# Altium PCB PCB.pcbdoc (part 1 of 2)
Units mil, origin at the board's own origin, x right, y up, seen from the top; angles counter-clockwise.
Board outline 3007 x 2843 mil, 2 copper layers (Top Layer, Bottom Layer); 56 components, 63 nets, 248 pads, 115 vias.
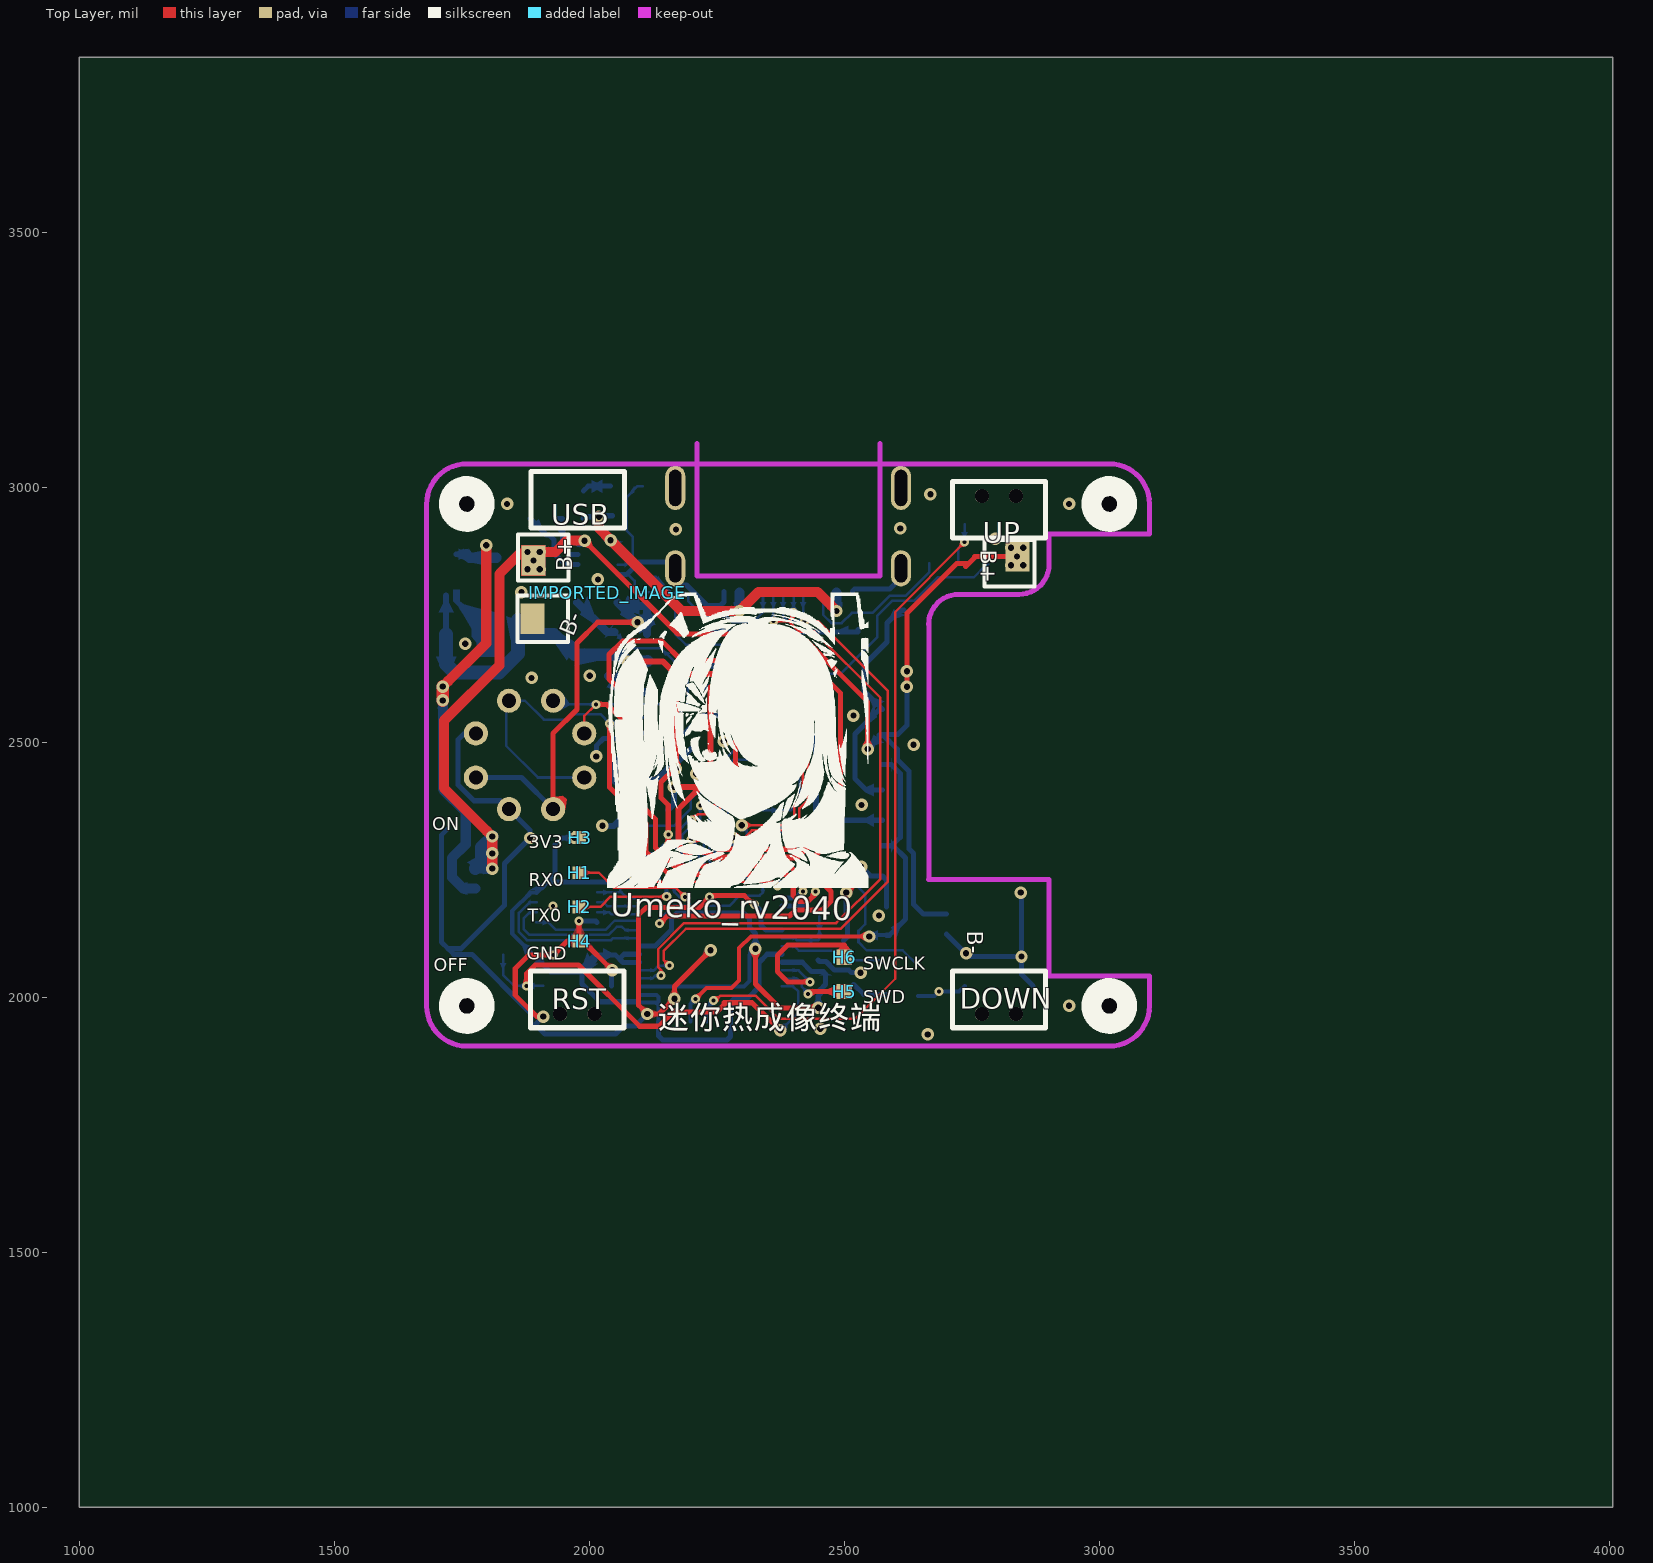
[diagram p0: Top Layer view]
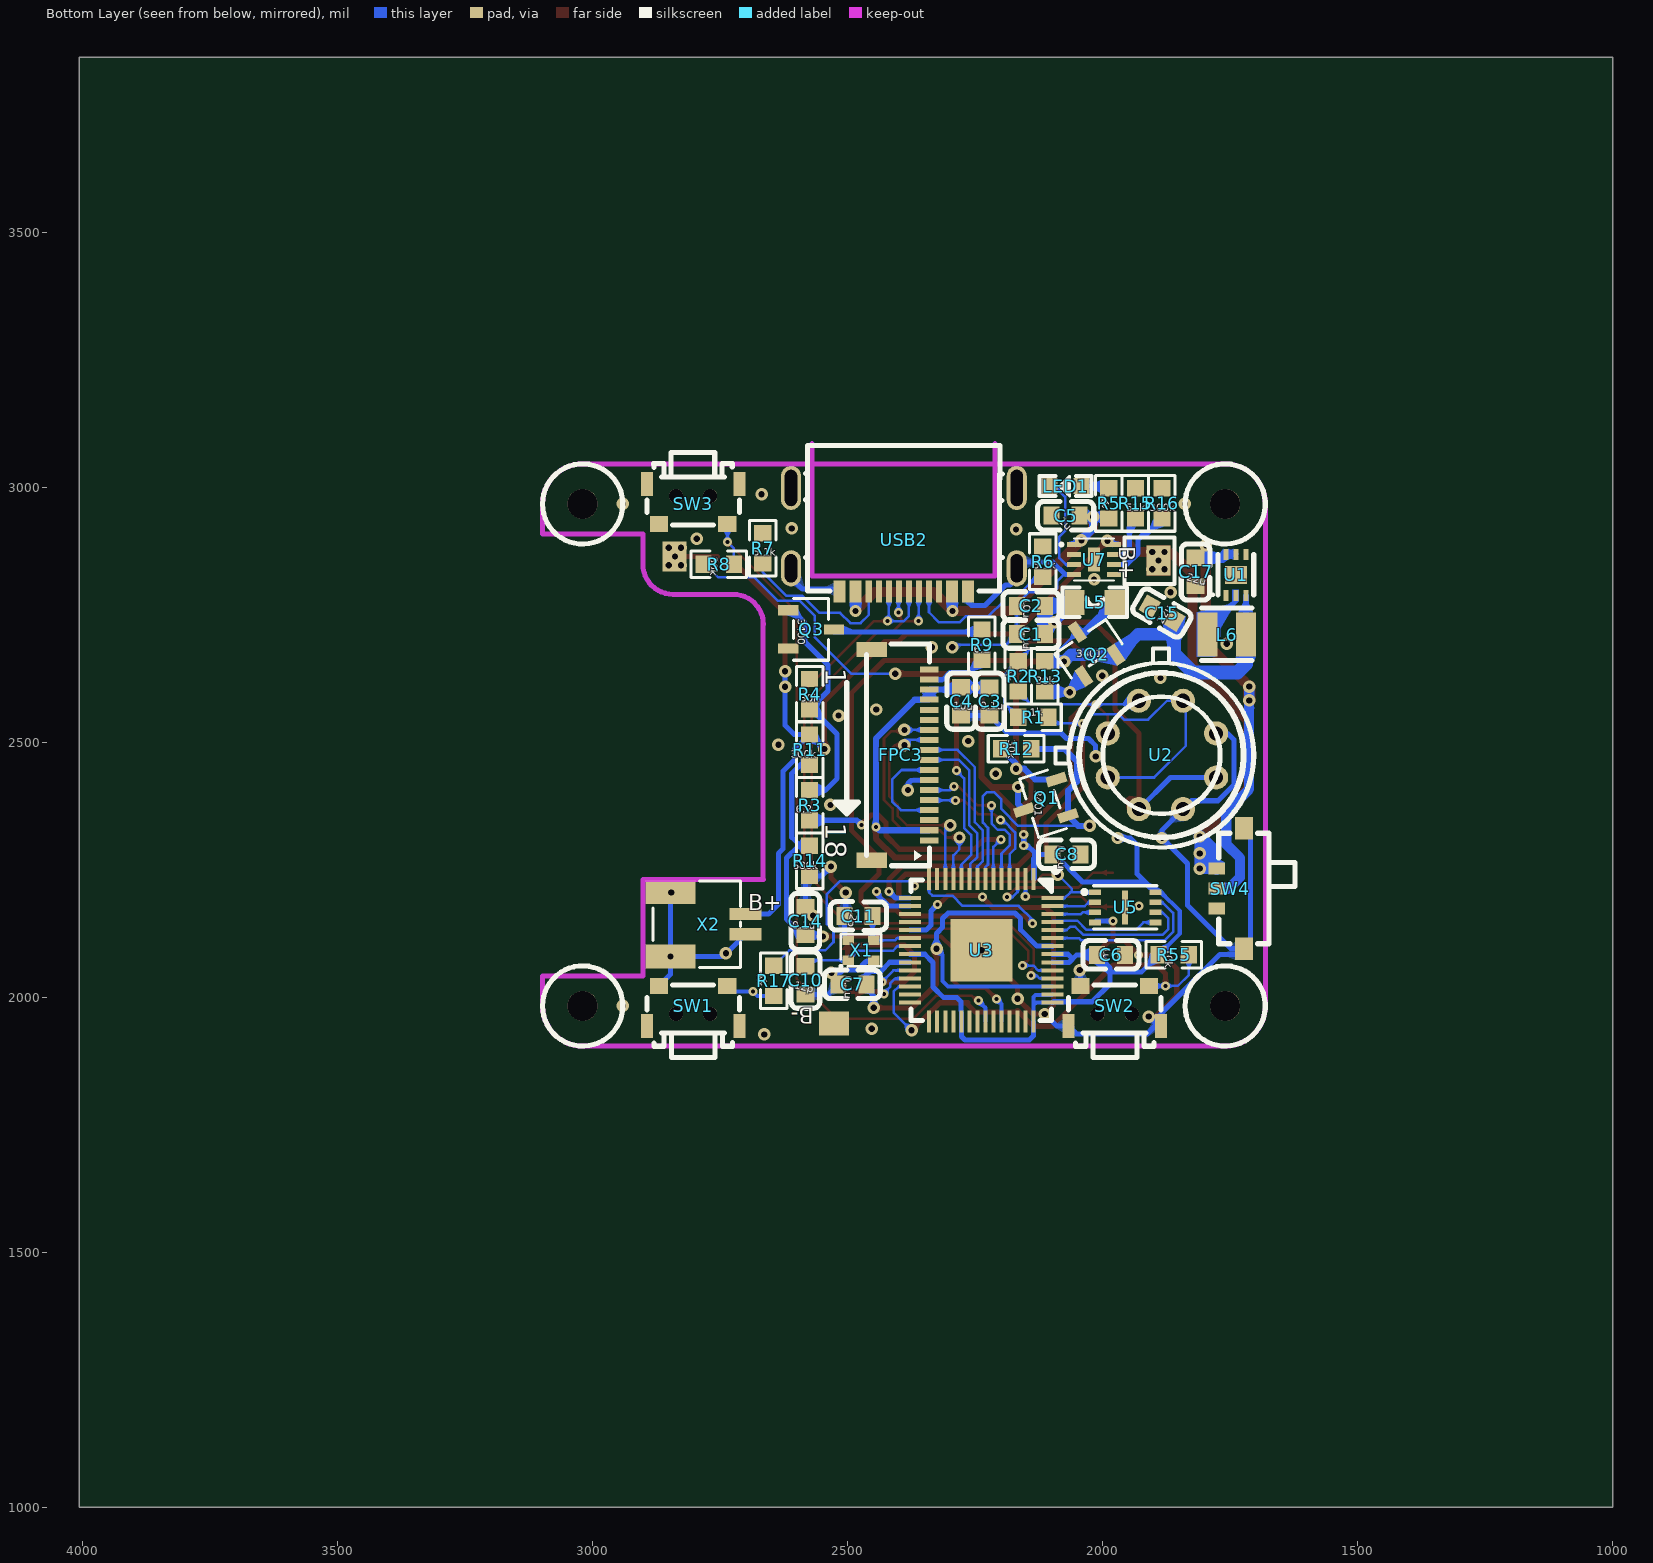
[diagram p1: Bottom Layer view, seen from below]

## Layer stack, top to bottom
Top Layer: signal copper (thickness not stored)
Dielectric: dielectric 12.6, FR-4, Dk 4.8
Bottom Layer: signal copper (thickness not stored)

## Board outline
4007,1000 1000,1000 1000,3843 4007,3843

## Components (designator, comment, footprint, x,y, rotation, side; value= is the part's Value field where it differs from the comment)
C1 "100nF" C0603 2141,2712 r180 bottom
C2 "10uF" C0603 2141,2767 r180 bottom
C3 "100nF" C0603 2222,2580 r90 bottom
C4 "10uF" C0603 2277.94,2580.06 r90 bottom
C5 "1uF" C0603 2073,2944 r180 bottom
C6 "1U" C0603 1984.04,2082.96 r0 bottom
C7 "1U" C0603 2491.04,2024.96 r180 bottom
C8 "0.1U" C0603 2071,2280 r0 bottom
C10 "12pf" C0603 2583,2033 r90 bottom
C11 "12pf" C0603 2479,2159 r0 bottom
C14 "100nF" C0603 2583,2149 r270 bottom
C15 "22uF" C0603 1883.94,2753.06 r30 bottom
C17 "22uF" C0603 1818.04,2833.96 r270 bottom
FPC3 "0.5K-HX-18PWB" FPC-SMD_18P-P0.50_HDGC_0.5K-HX-18PWB 2389.92,2474.88 r90 bottom
H1 "hp" HANPAN#1 1980,2244 r0 top
H2 "hp" HANPAN#1 1980,2177 r0 top
H3 "hp" HANPAN#1 1981,2313 r90 top
H4 "hp" HANPAN#1 1980,2110 r90 top
H5 "hp" HANPAN#2 2500,2011 r90 top
H6 "hp" HANPAN#2 2500,2078 r90 top
IMPORTED_IMAGE "IMPORTED_IMAGE" IMPORTED_IMAGE 2035.46,2792.56 r0 top
L5 "10uH" 0805-L 2015.94,2774.06 r0 bottom
L6 "SWPA252012S4R7MT" IND-SMD_L2.5-W2.0_SWPA252012S 1757,2711 r0 bottom
LED1 "led-0603" LED-0603 2073,3002 r0 bottom
Q1 "AO3401" SOT-23-3_L2.9-W1.3-P1.90-LS2.4-BR 2117,2379 r342 bottom
Q2 "AO3401" SOT-23-3_L2.9-W1.3-P1.90-LS2.4-BR 2027.94,2683.06 r56 bottom
Q3 "AO3400" SOT-23-3_L2.9-W1.4-P1.91-LS2.6-BR 2572,2721 r180 bottom
R1 "1K" R0603 2135.94,2549.06 r180 bottom
R2 "1K" R0603 2165.94,2629.06 r270 bottom
R3 "6.2" R0603 2574.94,2376.5 r270 bottom
R4 "30k" R0603 2574.94,2594.06 r270 bottom
R5 "1K" R0603 1988,2968 r270 bottom
R6 "5.1K" R0603 2117.94,2854.06 r270 bottom
R7 "5.1K" R0603 2667,2880 r90 bottom
R8 "30k" R0603 2753,2849 r180 bottom
R9 "6.2" R0603 2236.94,2691.06 r90 bottom
R11 "300K" R0603 2574.94,2485.46 r270 bottom
R12 "30k" R0603 2170,2487 r180 bottom
R13 "30k" R0603 2113.94,2629.06 r270 bottom
R14 "680K" R0603 2574.94,2267.06 r270 bottom
R15 "51K" R0603 1936,2968 r90 bottom
R16 "300K" R0603 1884,2968 r90 bottom
R17 "1k" R0603 2645,2032 r90 bottom
R55 "10K" R0603 1861,2083 r0 bottom
SW1 "1TS003B" KEY-SMD_1TS003B 2803.3,1982.75 r0 bottom
SW2 "1TS003B" KEY-SMD_1TS003B 1976.53,1982.75 r0 bottom
SW3 "1TS003B" KEY-SMD_1TS003B 2803.3,2967 r180 bottom
SW4 "SSAJ120100" SW-SMD_SSAJ120100 1750,2213 r270 bottom
U1 "SGM6036-3.3" UTDFN-6_L2.0-W1.5-P0.50-BL-EP 1739,2828 r0 bottom
U2 "MLX90640ESF-BAB-000-TU" TO-39-4_MELEXIS_MLX90640 1885.98,2474.88 r0 bottom
U3 "RP2040" LQFN-56_L7.0-W7.0-P0.4-EP 2238,2092 r90 bottom
U5 "W25Q16JVUXIQ" USON-8_L3.0-W2.0-P0.50-BL-EP 1956,2176 r90 bottom
U7 "SGM4056-6.8YTDE8G" TDFN-8L_L2.0-W2.0-P0.50-BL-EP 2017,2858 r90 bottom
USB2 "TYPEC-302-BRP16SC16" USB-C-SMD_TYPEC-302-BRP16SC16 2390,2897 r180 bottom
X1 "12MHz" 2016_4P 2474,2092 r0 bottom
X2 "AFC10-S02QCA-00" CONN-SMD_AFC10-S02QCA-00 2774,2143 r90 bottom

## Footprints (in the part's own frame and the unit in brackets; to place one, negate y for a bottom-side part, rotate by r counter-clockwise, add the part's x,y. Pads: shape width x height; smd on the part's side, far side on the other; paste and mask are expansions set on the pad)
0805-L [mm]
  rect 1x1.25 smd paste+0 mask+0.051: 1(1,0) 2(-1,0)
  silkscreen extent -1.6,-0.73 1.6,0.73
2016_4P [mm]
  rect 0.575x0.475 smd paste+0 mask+0.051: 1(0.638,0.488) 2(-0.638,0.488) 3(-0.638,-0.488) 4(0.638,-0.488)
  silkscreen extent -1,-0.8 1.05,0.85
C0603 [mm]
  rect 0.8x0.9 smd paste+0 mask+0.051: 1(0.7,0) 2(-0.7,0)
  silkscreen extent -1.39,-0.72 1.41,0.71
CONN-SMD_AFC10-S02QCA-00 [mm]
  rect 0.6x1.6 smd paste+0 mask+0.05: 1(0.5,-1.87) 2(-0.5,-1.87)
  rect 1.2x2.5 smd paste+0 mask+0.05: 3(1.61,1.87) 4(-1.61,1.87)
  silkscreen extent -2.15,-1.63 2.15,2.74
FPC-SMD_18P-P0.50_HDGC_0.5K-HX-18PWB [mm]
  rect 0.3x0.9 smd paste+0 mask+0.05: 1(-4.25,-1.261) 2(-3.75,-1.261) 3(-3.25,-1.261) 4(-2.75,-1.261) 5(-2.25,-1.261) 6(-1.75,-1.261) 7(-1.25,-1.261) 8(-0.75,-1.261) 9(-0.25,-1.261) 10(0.25,-1.261) 11(0.75,-1.261) 12(1.25,-1.261) 13(1.75,-1.261) 14(2.25,-1.261) 15(2.75,-1.261) 16(3.25,-1.261) 17(3.75,-1.261) 18(4.25,-1.261)
  rect 0.762x1.5 smd paste+0 mask+0.05: 19(5.25,1.6) 20(-5.25,1.6)
  silkscreen extent -5.52,-1.27 5.52,1.87
HANPAN#1 [mil]
  rect 25x25 smd paste+0 mask+2: 1(0,0)
HANPAN#2 [mil]
  rect 30x30 smd paste+0 mask+2: 1(0,0)
IMPORTED_IMAGE [mil]
  silkscreen extent 0,-578 512,0
IND-SMD_L2.5-W2.0_SWPA252012S [mm]
  rect 1x2.2 smd paste+0 mask+0.051: 1(0.95,0) 2(-0.951,0)
  silkscreen extent -1.26,-1.32 1.24,1.3
KEY-SMD_1TS003B [mm]
  rect 0.9x0.8 smd paste+0 mask+0.051: 1(-1.7,-1) 2(1.7,-1)
  rect 0.6x1.2 smd paste+0 mask+0.051: 3(2.3,1) 4(-2.3,1)
  round 0.7 hole 0.7 unplated paste+0: ""(-0.85,0.4) ""(0.85,0.4)
  silkscreen extent -2.3,-1.04 2.3,2.57
LED-0603 [mm]
  rect 0.8x0.8 smd paste+0 mask+0.102: 1(0.8,0) 2(-0.8,0)
  silkscreen extent -1.3,-0.5 1.3,0.5
LQFN-56_L7.0-W7.0-P0.4-EP [mm]
  rect 1.1x0.2 smd paste-100 mask+0.05: 1(3.55,-2.6) 2(3.55,-2.2) 3(3.55,-1.8) 4(3.55,-1.4) 5(3.55,-1) 6(3.55,-0.6) 7(3.55,-0.2) 8(3.55,0.2) 9(3.55,0.6) 10(3.55,1) 11(3.55,1.4) 12(3.55,1.8) 13(3.55,2.2) 14(3.55,2.6) 29(-3.55,2.6) 30(-3.55,2.2) 31(-3.55,1.8) 32(-3.55,1.4) 33(-3.55,1) 34(-3.55,0.6) 35(-3.55,0.2) 36(-3.55,-0.2) 37(-3.55,-0.6) 38(-3.55,-1) 39(-3.55,-1.4) 40(-3.55,-1.8) 41(-3.55,-2.2) 42(-3.55,-2.6)
  rect 0.2x1.1 smd paste-100 mask+0.05: 15(2.6,3.55) 16(2.2,3.55) 17(1.8,3.55) 18(1.4,3.55) 19(1,3.55) 20(0.6,3.55) 21(0.2,3.55) 22(-0.2,3.55) 23(-0.6,3.55) 24(-1,3.55) 25(-1.4,3.55) 26(-1.8,3.55) 27(-2.2,3.55) 28(-2.6,3.55) 43(-2.6,-3.55) 44(-2.2,-3.55) 45(-1.8,-3.55) 46(-1.4,-3.55) 47(-1,-3.55) 48(-0.6,-3.55) 49(-0.2,-3.55) 50(0.2,-3.55) 51(0.6,-3.55) 52(1,-3.55) 53(1.4,-3.55) 54(1.8,-3.55) 55(2.2,-3.55) 56(2.6,-3.55)
  rect 3.1x3.1 smd paste-100 mask+0.05: 57(0,0)
  silkscreen extent -3.5,-3.83 4.13,3.5
R0603 [mil]
  rect 31.75x34.02 smd paste-3937.01 mask+2: 1(29.66,0) 2(-29.65,0)
  silkscreen extent -55,-26 55,26
SOT-23-3_L2.9-W1.3-P1.90-LS2.4-BR [mm]
  rect 1x0.5 smd paste+0 mask+0.051: 1(-1,0.95) 2(-1,-0.95) 3(1,0)
  silkscreen extent -0.73,-1.53 0.73,1.53
SOT-23-3_L2.9-W1.4-P1.91-LS2.6-BR [mm]
  rect 1x0.5 smd paste+0 mask+0.051: 1(-1.135,0.955) 2(-1.135,-0.955) 3(1.135,0)
  silkscreen extent -0.88,-1.54 0.88,1.54
SW-SMD_SSAJ120100 [mm]
  rect 0.6x0.8 smd paste+0 mask+0.051: 1(1,-0.675) 2(-1,-0.675) C(0,-0.675)
  rect 1.1x0.9 smd paste+0 mask+0.051: 4(3,0.675) 5(-3,0.675)
  silkscreen extent -2.75,-0.58 2.75,3.22
TDFN-8L_L2.0-W2.0-P0.50-BL-EP [mm]
  rect 0.25x0.7 smd paste+0 mask+0.051: 1(0.75,1) 2(0.25,1) 3(-0.25,1) 4(-0.75,1) 5(-0.75,-1) 6(-0.25,-1) 7(0.25,-1) 8(0.75,-1)
  rect 1.2x0.6 smd paste+0 mask+0.051: 9(0,0)
  silkscreen extent -1.05,-1 1.05,1.63
TO-39-4_MELEXIS_MLX90640 [mm]
  round 1.2 hole 0.7 paste+0 mask+0.05: 1(1.1,-2.699) 2(1.1,2.701) 3(-1.1,2.701) 4(-1.1,-2.699)
  silkscreen extent -4.6,-5.3 4.6,4.6
USB-C-SMD_TYPEC-302-BRP16SC16 [mm]
  rect 0.6x1.1 smd paste-100 mask+0.05: 1(3.2,-2.575) 2(2.4,-2.575) 11(-2.4,-2.575) 12(-3.2,-2.575)
  rect 0.3x1.1 smd paste-100 mask+0.05: 3(1.75,-2.575) 4(1.25,-2.575) 5(0.75,-2.575) 6(0.25,-2.575) 7(-0.25,-2.575) 8(-0.75,-2.575) 9(-1.25,-2.575) 10(-1.75,-2.575)
  oval 1x1.8 hole 0.61 slot 1.4 at 90 deg paste+0 mask+0.05: 13(5.62,-1.425) 14(-5.62,-1.425)
  oval 1x2.2 hole 0.61 slot 1.8 at 90 deg paste+0 mask+0.05: 15(5.62,2.575) 16(-5.62,2.575)
  Keep-Out Layer lines w0.254: 4.533,-1.819 4.533,4.781 ; 4.518,-1.813 -4.582,-1.813 ; -4.582,-1.818 -4.582,4.782
  silkscreen extent -4.9,-2.56 4.9,4.7
USON-8_L3.0-W2.0-P0.50-BL-EP [mm]
  rect 0.28x0.6 smd paste+0 mask+0.051: 1(0.75,1.507) 2(0.25,1.507) 3(-0.25,1.507) 4(-0.75,1.507) 5(-0.75,-1.508) 6(-0.25,-1.507) 7(0.25,-1.508) 8(0.75,-1.507)
  rect 1.7x0.3 smd paste+0 mask+0.051: 9(0,0)
  silkscreen extent -1.08,-1.58 1.08,2.13
UTDFN-6_L2.0-W1.5-P0.50-BL-EP [mm]
  rect 0.25x0.55 smd paste+0 mask+0.05: 1(0.5,1.025) 2(0,1.025) 3(-0.5,1.025) 4(-0.5,-1.025) 5(0,-1.025) 6(0.5,-1.025)
  rect 1.1x0.9 smd paste+0 mask+0.05: 7(0,0)
  silkscreen extent -0.89,-1 1.22,1.05

## Free pads (board coordinates)
  rect 47.24x59.05 smd paste+0 mask+2: 1(1889.01,2741.99) 1(1891,2856) 1(2840,2864)
  rect 47.24x59.05 smd far side paste+0 mask+2: 1(1891,2856) 1(2840.04,2863.96)
  round 47.24 hole 27.56 paste+0 mask+1.97: 1(1990.27,2430.67) 2(1777.66,2430.67) 3(1777.66,2517.29) 4(1990.27,2517.29)
  rect 59.05x47.24 smd far side paste+0 mask+2: 1(2527,1948)
  round 59.06 hole 59.06 unplated paste+0: ""(1760,1982.75) ""(1760,2967) ""(3019.84,1982.75) ""(3019.84,2967)

## Via types
v1: diameter 24.41, hole 12.2, Top Layer to Bottom Layer, tented both sides, 77 vias
v2: diameter 17.72, hole 7.87, Top Layer to Bottom Layer, tented both sides, 36 vias
v3: diameter 23.62, hole 11.81, Top Layer to Bottom Layer, tented both sides, 2 vias

## Nets (pads, with @x,y where several pads share a name; then routed paths per layer and width w, separated by ;. In a path a pad name is that pad's centre, name@x,y a point inside that pad or via, vN(x,y) a via of type N, cw(c..) or ccw(c..) an arc to the next point about the centre after c; other vN are vias at no path point)
1.1V: C7.1 U3.23 U3.45 U3.50 | length 991.5
  Top Layer w10: v1(2326,2095) 2326,2026 2372.99,1979 v1(2449,1979)
  Bottom Layer w8: U3.45@2098.24,2021.16 2303.14,2021.16 2314.04,2031.96 2314.04,2082.96 v1(2326,2095)
  Bottom Layer w10: U3.50@2098.23,2099.88 2129.04,2099.96 2161.04,2131.96 2161.04,2153.96 2172.04,2164.96 2303.04,2164.96 2314.04,2153.96 2314.04,2136.96 2326.04,2124.96 v1(2326,2095) ; U3.23@2377.74,2068.36 2417.64,2068.36 2436.04,2049.96 2459.04,2049.96 2463.44,2045.56 2463.44,2024.96 2453.04,2014.56 2453.04,2005.96 2449.04,2001.96 v1(2449,1979)
3V3: C6.1 C8.1 C15.2 H3.1 L6.2 Q1.2 Q2.2 R8.2 R12.2 R13.2 R55.1 U1.3 U3.1 U3.10 U3.22 U3.33 U3.42 U3.43 U3.44 U3.48 U3.49 U5.8 | length 4302.2
  Top Layer w10: v2(2155,2319) v2(2155,2297) 2155,2377 2141,2391 2141,2422 2167,2448 v1(2170,2448) ; v2(2287,2444) 2287.04,2602.96 2318.04,2633.96 v1(2407,2634)
  Top Layer w11.81: v1(2076,2658) 2145,2658 2170,2632.99 v1(2170,2448) ; 2169.94,2633.06 2170.89,2634 v1(2407,2634)
  Bottom Layer w5: U3.10@2277.34,2231.76 2277.34,2259.66 2258.04,2278.96 2258.04,2318.06 2272.04,2331.96 2272.04,2428.96 v2(2287,2444) ; v1(2407,2634) 2493.04,2633.96 2564.94,2705.96 2564.94,2747.96 2594.04,2776.96 2636.96,2776.96 2683,2823 2754,2823 2780,2849 R8.2@2782.66,2849
  Bottom Layer w8: R55.1@1890.64,2082.96 1849.04,2124.66 1849.04,2168.96 1885.54,2205.56 U5.8@1896.64,2205.56 ; U3.43@2098.24,1989.66 2131.04,1988.96 2135.64,1984.36 ; U3.44@2098.23,2005.39 2099.64,2003.96 2132.04,2003.96 2135.64,2000.36 2135.64,1984.36 ; U3.42@2135.64,1952.26 2135.64,1984.36
  Bottom Layer w10: R55.1@1890.64,2082.96 1924.64,2048.96 1988.04,2048.96 2011.54,2072.56 C6.1@2011.54,2082.96 ; v1(1971,2312) 1946.04,2311.96 1933.04,2298.96 1933.04,2241.86 1896.64,2205.56 1917.14,2225.96 2039.94,2225.96 2094.04,2279.96 2127.04,2279.96 2135.64,2271.36 U3.1@2135.64,2231.77 2134.04,2233.36 2134.04,2283.96 2147.04,2296.96 v2(2155,2297) ; 2059.04,2074.96 2068.24,2084.16 U3.49@2098.24,2084.16 ; U3.43@2098.24,1989.66 2096.84,1990.96 2021.04,1990.96 1986.04,2025.96 1986.04,2057.46 C6.1@2011.54,2082.96 ; U3.48@2098.23,2068.38 2066.04,2067.96 2051.04,2082.96 C6.1@2011.54,2082.96 ; U3.42@2135.64,1952.26 2135.64,1924.36 2144.04,1915.96 2270.04,1915.96 2277.04,1922.96 2277.34,1952.26 2278.04,1990.96 2286.04,1998.96 2311.94,1998.96 2333.04,2019.96 2333.04,2067.96 2349.14,2084.16 2377.74,2084.16 U3.22@2368.14,2084.16 ; v2(2155,2297) v2(2155,2319)
  Bottom Layer w11.81: U1.3@1719.34,2787.66 1719.34,2711.26 L6.2@1719.54,2710.96 ; Q1.2@2091.14,2426.76 2132.74,2426.76 2153.94,2447.96 v1(2170,2448) 2170.04,2457.39 R12.2@2199.65,2487
  Bottom Layer w23.62: C15.2@1860.04,2739.26 1860.04,2711.56 1930.94,2711.56 1971.14,2671.36 1974.94,2671.36 2062.64,2671.36 v1(2076,2658) R13.2@2113.94,2658.76
  Bottom Layer w27.56: L6.2@1719.54,2710.96 1719.54,2653.46 1736.04,2636.96 1822.84,2636.96 1860.04,2674.16 C15.2@1860.04,2739.26
+5V: C5.1 R5.1 U7.1 USB2.2 USB2.11 | length 809.4
  Top Layer w19.68: v1(2019,2942) 2019,2919 v1(2042,2896) 2180.5,2757.5 v3(2294.94,2757.5) 2332.25,2794.81 2447.63,2794.81 v3(2484.94,2757.5)
  Bottom Layer w10: R5.1@1988.04,2938.36 1991.64,2941.96 v1(2019,2942) 2021.04,2943.96 C5.1@2045.44,2944 ; U7.1@2050.44,2887.56 v1(2042,2896) U7.1@2050.44,2887.56 ; U7.1@2050.44,2887.56 2056.34,2887.56 U7.1@2050.44,2887.56
  Bottom Layer w15.75: v1(2019,2942) 2019,2919 v1(2042,2896)
  Bottom Layer w19.68: v3(2294.94,2757.5) 2295.04,2757.56 USB2.2@2295.04,2793.36 ; USB2.11@2484.84,2793.36 2484.84,2757.66 v3(2484.94,2757.5)
ADC: C14.1 R11.1 R14.2 U3.38 | length 945.6
  Top Layer w8: v2(2208,1996) 2230.04,2017.96 2279.04,2017.96 2294.04,2032.96 2294.04,2095.96 2317.04,2118.96 v1(2549.04,2118.96)
  Bottom Layer w8: U3.38@2198.64,1952.26 2198.64,1986.66 v2(2208,1996) ; v1(2549.04,2118.96) 2551.54,2121.46 C14.1@2583.04,2121.46
  Bottom Layer w10: R11.1@2574.94,2455.86 2592.64,2455.86 2609.94,2438.46 2609.94,2313.46 2593.14,2296.76 2574.94,2296.76 2596.24,2296.76 2620.04,2272.96 2620.04,2152.96 2588.44,2121.46 C14.1@2583.04,2121.46
BAT: pad.1@1891,2856 pad.1@2840,2864 pad.1@2840.04,2863.96 R11.2 SW4.2 U7.8 X2.1 | length 2921.9
  Top Layer w10: v1(1991,2895) 2174.05,2711.96 2386.04,2711.96 2401.04,2696.96 2428.04,2696.96 2545.94,2579.06 v1(2545.94,2486.5) ; v1(2623,2608.54) v1(2623,2639) ; v1(2623,2639) 2623.04,2752.96 2720.04,2849.96 2744.04,2849.96 ; 2738.25,2844.25 2756,2862 2756,2864 v1(2839,2864)
  Top Layer w19.68: v1(1879,2873) 1934,2873 1956,2895 v1(1991,2895)
  Top Layer w20: v1(1810,2252) v1(1810,2281.91) v1(1810,2315) ; v1(1810,2315) 1715.04,2409.96 1715.04,2541.96 1824.04,2650.96 1824.04,2829.96 1863.04,2868.96 1875.04,2868.96 v1(1879,2873)
  Bottom Layer w10: U7.8@1977.64,2887.56 1983.54,2887.56 v1(1991,2895) ; v1(2545.94,2486.5) 2567.94,2508.46 2567.94,2514.16 R11.2@2574.94,2514.16 ; R11.2@2574.94,2515.12 2605.12,2515.12 2623,2533 v1(2623,2608.54) v1(2623,2639) ; R11.2@2574.94,2515.16 2604.04,2486.06 2604.04,2465.76 2627.04,2442.86 2627.04,2290.96 2636.04,2281.96 2636.04,2181.96 2655.34,2162.66 X2.1@2700.34,2162.66
  Bottom Layer w20: v1(1810,2252) v1(1810,2281.91) v1(1810,2315) ; v1(1810,2252) 1776.54,2252.36 1806.14,2281.96 v1@1810.04,2281.96
  Bottom Layer w25: SW4.2@1776.54,2252.36 1789.04,2264.76 1789.04,2293.96 v1(1810,2315)
  other v1: 1879,2839 1903,2839 2827,2847 2851,2847 1891,2856 1903,2873 2827,2881 2851,2881
BLK: R3.1 U3.6 | length 519.8
  Top Layer w10: v2(2200,2309) 2233.04,2308.96 2252.14,2289.96 2398.04,2289.96 2425.04,2316.96 2425.04,2341.96 2440.04,2356.96 2454.04,2356.96 v2(2473.04,2337.96)
  Bottom Layer w5: v2(2200,2309) 2214.34,2294.66 U3.6@2214.34,2231.76
  Bottom Layer w10: v2(2473.04,2337.96) 2481.94,2346.86 R3.1@2574.94,2346.86
C1_1: C1.1 C2.1 L5.1 pad.2 U2.2 | length 860.9
  Top Layer w10: U2.2@1929.24,2368.56 1929.24,2517.26 1975.94,2563.96 1975.94,2694.46 2016.54,2735.06 v1(2094.94,2735.06)
  Bottom Layer w10: pad.2@1777.66,2430.67 1867.18,2430.69 U2.2@1929.29,2368.58
  Bottom Layer w13.78: v1(2094.94,2735.06) 2113.44,2716.56 C1.1@2113.44,2712
  Bottom Layer w15.75: v1(2094.94,2735.06) 2094.34,2735.06 L5.1@2055.31,2774.06 2062.44,2766.96 C2.1@2113.44,2767 C1.1@2113.44,2712
C3_1: C3.1 C4.1 FPC3.2 FPC3.15 FPC3.16 Q1.3 | length 1351
  Top Layer w11.81: v1(2166,2412) 2218.08,2412 2238.04,2431.96 2238.04,2606.96 v2(2250,2607) ; 2237,2431 2175.04,2368.86 2175.04,2298.96 2189.04,2284.96 2231.84,2284.96 2242.84,2273.96 2408.04,2273.96 2445.04,2310.96 v2(2445,2334)
  Bottom Layer w11.81: Q1.3@2154.44,2366.83 2166,2378.39 v1(2166,2412) ; C3.1@2222,2607.56 2222.54,2606.96 v2(2250,2607) 2250.64,2607.66 2277.94,2607.66 2282.74,2602.86 2340.24,2602.86 2340.24,2583.16 2368.84,2583.16 2445.04,2506.96 v2(2445,2334) 2438.24,2327.26 FPC3.2@2340.24,2327.26
CAM_VDD: Q2.1 R13.1 U3.14 | length 1742.4
  Top Layer w10: v1(2065,2598) 2039.04,2623.96 2039.04,2671.96 2065.04,2697.96 2143.04,2697.96 2181.04,2659.96 2429.04,2659.96 2493.04,2595.96 2493.04,2327.05 2439,2273.01 2439,2242 2474,2207 2474,2188 2457,2171 2404.98,2171 2392.94,2158.96 2152.97,2158.96 v2(2138,2144)
  Bottom Layer w5: v2(2138,2144) 2138.04,2151.96 2165.04,2178.96 2275.04,2178.96 2295.04,2198.96 2334.04,2198.96 2340.34,2205.36 U3.14@2340.34,2231.76
  Bottom Layer w15.75: Q2.1@2036.94,2629.56 2065.04,2601.46 v1(2065,2598) 2112.54,2597.96 R13.1@2113.94,2599.41
CHA: LED1.1 U7.3 | length 197.8
  Bottom Layer w5: U7.3@2056.34,2848.16 2072.14,2848.16 2084.94,2860.96 2084.94,2903.06 2073.94,2914.06 2073.94,2981.06 2094.84,3001.96 LED1.1@2104.49,3002
CS: FPC3.11 U3.12 | length 441.8
  Top Layer w5: v1(2299,2337) 2384,2337 2402,2355 2402,2377 2418.93,2393.93 2418.93,2482.07 2407,2494 v1(2389,2494)
  Bottom Layer w5: v1(2299,2337) 2308.84,2327.16 U3.12@2308.84,2231.76 ; FPC3.11@2340.24,2504.46 2378.54,2504.46 v1(2389,2494)
DC: FPC3.12 U3.11 | length 494.2
  Top Layer w5: v1(2281,2313) 2305,2313 2319,2327 2392,2327 2412,2347 2412,2370 2429,2387 2429,2507 2415,2521 2392,2521 v1(2389,2524)
  Bottom Layer w5: v1(2281,2313) 2281.04,2289.96 2293.14,2277.86 U3.11@2293.12,2231.77 ; FPC3.12@2340.24,2524.06 v1(2389,2524)
DCDC_VIN: C17.2 SW4.C U1.5 U1.6 | length 879.8
  Top Layer w20: v1(1713,2609) 1798,2694 v1(1798,2886)
  Top Layer w25: v1(1713,2581.76) v1(1713,2609)
  Bottom Layer w10: U1.5@1739,2868.35 U1.6@1758.69,2868.35
  Bottom Layer w20: v1(1713,2581.76) v1(1713,2609) ; v1(1713,2581.76) 1713.04,2407.96 1758.04,2362.96 1758.04,2299.96 1731.04,2273.06 1731.04,2234.96 1753.04,2212.96 SW4.C@1776.54,2212.96 ; U1.6@1758.69,2868.35 1765.54,2861.56 C17.2@1818.04,2861.56
FPC3_17: FPC3.17 R9.2 | length 119.3
  Bottom Layer w10: R9.2@2236.94,2661.41 2261.84,2636.46 2299.94,2636.46 2313.94,2622.56 FPC3.17@2340.24,2622.56
GND: C1.2 C2.2 C3.2 C4.2 C5.2 C6.2 C7.2 C8.2 C10.2 C11.1 C14.2 C15.1 C17.1 FPC3.1 FPC3.7 FPC3.13 FPC3.14 FPC3.18 FPC3.19 FPC3.20 H4.1 pad.1@1889.01,2741.99 pad.1@2527,1948 pad.3 Q3.2 R4.2 R6.2 R7.1 R14.1 R15.1 R16.1 SW1.2 SW1.3 SW1.4 SW2.2 SW2.3 SW2.4 SW3.1 SW3.3 SW3.4 SW4.4 SW4.5 U1.4 U1.7 U2.3 U3.19 U3.57 U5.4 U7.4 U7.5 U7.9 USB2.1 USB2.12 USB2.13 USB2.14 USB2.15 USB2.16 X1.2 X1.4 X2.2 X2.3 X2.4 | length 4488.4
  Top Layer w10: v1(1910,1962) 1897.04,1961.96 1855.04,2003.96 1855.04,2055.96 1882.04,2082.96 v2(1930,2083) 1957.04,2109.96 H4.1@1980,2110 ; v2(1980,2149) H4.1@1980,2110 ; v1(2045,2053) 1988.04,2109.96 H4.1@1980,2110 ; v1(2238,2092) 2167,2021 v1(2167,1997) 2137,1967 v1(2114,1967) 2097,1984 2097,2162 2112,2176 2216,2176 v2(2236,2196) 2239,2199 2304,2199 2321,2182 v2(2324,2182) ; v1(2504,2205) 2533,2234 v1(2533,2256)
  Bottom Layer w5: 2076.44,2828.46 2089.04,2815.96 2089.04,2801.96 2097.04,2793.96 2145.04,2793.96 2168.54,2770.46 2168.54,2766.96 2168.54,2711.96 2189.54,2690.96 2290.04,2690.96 v1(2295,2686)
  Bottom Layer w10: SW4.5@1723.42,2331.11 1710.04,2317.66 1710.04,2108.36 SW4.4@1723.42,2094.89 ; pad.3@1777.66,2517.29 1755.31,2517.31 1743,2505 1743,2416 1774,2385 1826.25,2385 1842.67,2368.58 1884,2327.25 v1(1884,2312) ; v1(1884,2312) 1834.04,2261.96 1834.04,2179.96 1748.84,2094.86 SW4.4@1723.42,2094.89 ; v1(1910,1962) 1891.34,1943.36 SW2.4@1885.94,1943.36 ; v2(1980,2149) 2012.84,2148.96 U5.4@2015.34,2146.47 ; v1(2014,2472) 2014,2492.92 2028.04,2506.96 2071.04,2506.96 2082.04,2517.96 2187.54,2517.96 2222.04,2552.46 C4.2@2277.94,2552.51 ; SW2.2@2043.44,2022.16 2043.44,2051.46 v1(2045,2053) ; U7.4@2056.34,2828.46 2073.44,2828.46 2098.04,2852.96 2156.64,2852.96 USB2.13@2168.74,2840.91 2168.74,2821.26 2181.74,2808.26 2190.74,2808.26 2231.04,2767.96 2257.04,2767.96 2264.04,2774.96 USB2.1@2264.02,2795.61 ; v1(2114,1967) 2090.34,1943.36 2067.04,1943.36 2051.74,1927.96 1913.04,1927.96 1897.64,1943.36 SW2.4@1885.94,1943.36 ; v2(2324,2182) 2337.04,2168.96 2337.04,2140.96 2346.64,2131.36 U3.19@2377.74,2131.36 ; FPC3.7@2340.24,2425.66 2376.04,2424.96 2382.04,2418.96 v1(2382,2406) ; X1.2@2448.84,2072.76 2451.64,2069.96 2464.04,2069.96 2481.04,2052.96 2509.04,2052.96 2514.04,2047.96 v1(2532,2048) ; X1.4@2499.12,2111.21 2506.54,2118.66 2506.54,2158.96 2504.04,2161.56 v1(2504,2205) ; USB2.12@2515.94,2795.66 2520.34,2799.96 2589.04,2799.96 2611.24,2822.26 USB2.14@2611.24,2840.86 ; C7.2@2518.54,2024.96 2538.14,2005.46 C10.2@2583.04,2005.46 ; v1(2533,2256) 2551.64,2237.36 R14.1@2574.94,2237.41 2583.04,2229.36 C14.2@2583,2176.55 ; X2.2@2700.37,2123.32 2744.07,2079.62 v1(2847.61,2079.61) ; X2.3@2847.62,2206.39 v1(2847.61,2079.61) ; SW1.2@2870.24,2022.12 2847.61,2044.74 v1(2847.61,2079.61) ; SW4.4@1723.42,2094.89 1734.34,2083.96 1770.04,2083.96 1885.94,1968.06 SW2.4@1885.94,1943.36
  other v1: 2664,1927 2453,1938 2941,1983 2739,2086 2568,2160 2568,2160 2846,2205 2534,2377 2210,2438 2636,2495 2264,2502 2518,2552 2444,2564 1887,2626 2001,2630 2335,2686 1757,2693 1867,2794 2017,2819 2796,2899 2170,2917 2610,2919 1839,2967 2941,2967 2669,2986
  other v2: 1929,2179
KEY: R8.1 SW3.2 U3.36 | length 1453.5
  Top Layer w5: v2(2244,1993) 2247.04,1992.96 2257.04,2002.96 2326.04,2002.96 2371.04,1957.96 2521.94,1957.96 2600.04,2036.06 2600.04,2754.96 v2(2736,2892)
  Bottom Layer w5: R8.1@2723.34,2849 2723.34,2879.26 v2(2736,2892) SW3.2@2736.34,2927.66
  Bottom Layer w8: U3.36@2230.14,1952.26 2230.14,1979.16 v2(2244,1993)
L6_1: L6.1 U1.2
L_RST: FPC3.4 FPC3.8 | length 203.4
  Bottom Layer w5: FPC3.4@2340.24,2366.66 2395.64,2366.66 2413.04,2383.96 2413.04,2426.96 2394.64,2445.36 FPC3.8@2340.24,2445.36
LCD_VDD: Q1.1 R12.1 U3.7 | length 682.7
  Bottom Layer w5: v1(2026,2336) 2165.94,2335.96 2199.04,2369.06 2199.04,2387.96 2213.04,2401.96 2227.04,2401.96 2235.04,2393.96 2235.04,2342.06 2225.04,2331.96 2225.04,2259.96 2230.14,2254.86 U3.7@2230.12,2231.77
  Bottom Layer w11.81: v1(2026,2336) 2048.4,2336 Q1.1@2068,2355.59 2068,2405 2050.94,2422.06 2050.94,2462.46 2075.44,2486.96 R12.1@2140.34,2487
MOSI: FPC3.9 U3.9 | length 312.8
  Bottom Layer w5: U3.9@2261.62,2231.77 2260.04,2233.36 2260.04,2260.96 2246.04,2274.96 2246.04,2320.96 2261.64,2336.66 2261.64,2444.66 2282.04,2465.06 FPC3.9@2340.24,2465.06
QSPI_SCLK: U3.52 U5.6 | length 291.4
  Bottom Layer w5: U5.6@1896.64,2166.16 1883.14,2166.16 1872.04,2154.96 1872.04,2132.96 1883.04,2121.96 2038.04,2121.96 2054.04,2137.96 2064.04,2137.96 2070.64,2131.36 U3.52@2098.23,2131.37
QSPI_SD0: U3.53 U5.5 | length 217.9
  Bottom Layer w5: U5.5@1896.65,2146.47 1920.54,2146.46 1935.04,2131.96 2032.04,2131.96 2050.04,2149.96 2098.24,2149.96 U3.53@2098.24,2147.16
QSPI_SD1: U3.55 U5.2 | length 85.9
  Bottom Layer w5: U5.2@2015.34,2185.86 2028.14,2185.86 2035.34,2178.66 U3.55@2098.24,2178.66
QSPI_SD2: U3.54 U5.3 | length 84.3
  Bottom Layer w5: U5.3@2015.35,2166.16 2039.54,2166.16 2042.84,2162.86 U3.54@2098.23,2162.87
QSPI_SD3: U3.51 U5.7 | length 324.7
  Bottom Layer w5: U5.7@1896.64,2185.86 1882.54,2185.76 1862.04,2165.16 1862.04,2127.96 1878.04,2111.96 2042.94,2111.96 2046.64,2115.66 U3.51@2098.24,2115.66
QSPI_SS: R17.1 U3.56 U5.1 | length 850.2
  Top Layer w5: v1(2088,2240) 2118,2240 2132,2226 2361,2226 v2(2369,2218)
  Bottom Layer w5: U5.1@2015.34,2205.56 2063.44,2205.56 2074.64,2194.36 U3.56@2098.23,2194.36 ; 2060.84,2205.56 2060.84,2212.84 v1(2088,2240) ; v2(2369,2218) 2369.04,2226.96 2516.04,2226.96 2541.04,2201.96 2541.04,2142.96 2528.04,2129.96 2528.04,2107.96 2544.04,2091.96 2614.69,2091.96 R17.1@2645,2061.65
R1_2: L5.2 Q2.3 R1.2 R2.2 | length 369.4
  Bottom Layer w5: Q2.3@2049.94,2715.66 2081.54,2684.06 2140.64,2684.06 2165.94,2658.76 2192.94,2631.76 2192.94,2576.36 R1.2@2165.59,2549.06
  Bottom Layer w15.75: L5.2@1976.54,2774.06 2034.94,2715.66 Q2.3@2049.94,2715.66
R3_2: Q3.1 R3.2 R4.1 | length 470.5
  Bottom Layer w10: R3.2@2574.94,2406.15 2543.24,2406.16 2520.94,2428.46 2520.94,2515.96 2569.34,2564.36 R4.1@2574.94,2564.41 2538.94,2600.36 2538.94,2651.46 2583.94,2696.46 2583.94,2733.46 2609.04,2758.56 Q3.1@2616.64,2758.56
R5_2: LED1.2 R5.2 | length 56.4
  Bottom Layer w10: R5.2@1988.94,2992.76 1998.14,3001.96 LED1.2@2041.5,3002
R6_1: R6.1 USB2.4 | length 312
  Bottom Layer w5: R6.1@2117.94,2824.46 2129.54,2824.46 2161.04,2792.96 2187.04,2792.96 2194.04,2785.96 2194.04,2776.96 2224.04,2746.96 2268.44,2746.96 2280.54,2734.96 2321.04,2734.96 2340.74,2754.66 USB2.4@2340.74,2793.36
R7_2: R7.2 USB2.10 | length 316.6
  Bottom Layer w5: USB2.10@2458.84,2793.36 2458.84,2749.56 2474.94,2733.46 2494.94,2733.46 2514.94,2753.46 2555.44,2753.46 2589.04,2786.96 2619.94,2786.96 2667,2834.02 R7.2@2667,2850.35
R9_1: Q3.3 R9.1 | length 294.5
  Bottom Layer w10: R9.1@2237.64,2716.16 2527.34,2716.16 Q3.3@2527.31,2721
R17_2: R17.2 SW1.1 | length 99.6
  Bottom Layer w7.87: R17.2@2645,2002.35 2677.34,2002.34 v2(2686,2011) 2725.19,2011 SW1.1@2736.34,2022.16
RST: R55.2 SW2.1 U3.26 | length 885.2
  Top Layer w10: v2(1877,2022) 1877.04,2046.06 1894.04,2062.96 1979.04,2062.96 2099.04,1942.96 2136.14,1942.96 2167.04,1973.86 2170.04,1970.96 2250.04,1970.96 2264.04,1984.96 2264.04,1988.96 2319.24,1988.96 v1(2375,1935) v1@2375.04,1927.96
  Bottom Layer w5: R55.2@1831.35,2083 1831.34,2043.66 1853.04,2021.96 v2(1877,2022) 1877.04,2022.16 SW2.1@1909.64,2022.16 ; v1(2375,1935) 2410.04,1969.96 2410.04,2010.96 2399.84,2021.16 U3.26@2377.74,2021.16
S$30731: 
S$30748: 
S$30752: 
S$37893: 
S$37901: 
S$37925: 
S$37929: 
S$69478: 
S$69482: 
S$69498: 
S$69502: 
S$70340: 
S$157009: 
SCL: pad.1@1990.27,2430.67 R1.1 U2.4 U3.16 | length 1327.2
  Top Layer w10: v2(2040,2537) 2040.04,2410.96 2111,2340 2111,2286.01 2156.01,2241 2387,2241 2400,2228 2400,2199 2411.04,2187.96 2429.04,2187.96 2444,2202.92 v2(2444,2207)
  Bottom Layer w5: pad.1@1990.27,2430.67 1899.34,2430.66 1837.04,2492.96 1837.04,2575.46 1842.64,2581.16 1873.84,2581.16 1911.04,2543.96 1958.04,2543.96 1969.04,2554.96 2022.04,2554.96 v2(2040,2537) 2094.14,2536.96 R1.1@2106.24,2549.06
  Bottom Layer w10: U3.16@2377.74,2178.66 2419.64,2178.66 2444.04,2202.96 v2(2444,2207)
SCLK: FPC3.10 U3.8 | length 333.5
  Bottom Layer w5: U3.8@2245.84,2231.76 2245.84,2256.16 2235.04,2266.96 2235.04,2326.96 2251.04,2343.06 2251.04,2450.96 2284.74,2484.76 FPC3.10@2340.24,2484.76
SDA: pad.4 R2.1 U2.1 U3.15 | length 1043.7
  Top Layer w5: pad.4@1990.27,2517.29 1990.3,2551.3 v2(2013,2574)
  Top Layer w10: v2(2013,2574) 2035.04,2573.96 2062.04,2546.96 2062.04,2416.96 2130.04,2348.96 2130.04,2292.96 2166.04,2256.96 2393.04,2256.96 2419.04,2230.96 v2(2419,2207)
  Bottom Layer w5: U2.1@1929.29,2581.18 1936.47,2574 v2(2013,2574) ; v2(2013,2574) 2140.54,2573.96 R2.1@2165.94,2599.41
  Bottom Layer w10: U3.15@2377.74,2194.36 2406.34,2194.36 v2(2419,2207)
SWCLK: H6.1 U3.24 | length 332.3
  Top Layer w10: v2(2433,2030) 2389.04,2029.96 2369.04,2049.96 2369.04,2081.96 2389.04,2101.96 2500.04,2101.96 H6.1@2500,2078
  Bottom Layer w5: U3.24@2377.74,2052.66 2410.34,2052.66 v2(2433,2030)
SWD: H5.1 U3.25 | length 142.1
  Top Layer w10: v2(2429,2006) 2434.04,2010.96 H5.1@2500,2011
  Bottom Layer w5: U3.25@2377.74,2036.86 2408.04,2035.96 2416.84,2027.16 2416.84,2020.16 2429.04,2007.96 v2(2429,2006)
TP_INT: FPC3.3
TP_SCL: FPC3.6 U3.5 | length 314.6
  Top Layer w5: v2(2218,2376) 2246.04,2375.96 2283.04,2412.96 v2(2292,2413)
  Bottom Layer w5: U3.5@2198.63,2231.77 2198.64,2281.36 2182.04,2297.96 2182.04,2317.96 2192.04,2327.96 2205.94,2327.96 2218.04,2340.06 v2(2218,2376) ; v2(2292,2413) 2299.04,2405.96 FPC3.6@2340.24,2405.96
TP_SDA: FPC3.5 U3.4 | length 290.1
  Top Layer w5: v2(2201,2347) 2213,2359 2245,2359 2272,2386 v2(2289,2386)
  Bottom Layer w5: U3.4@2182.84,2231.76 2182.84,2280.16 2172.04,2290.96 2172.04,2322.96 2196.04,2346.96 v2(2201,2347) ; v2(2289,2386) 2339.94,2385.96 FPC3.5@2340.24,2386.26
U0_RX0: H1.1 U3.3 | length 278.8
  Top Layer w5: H1.1@1980,2244 2019.04,2243.96 2048.04,2214.96 2169.04,2214.96 v2(2188,2196)
  Bottom Layer w5: U3.3@2167.13,2231.77 2167.14,2205.86 2177.04,2195.96 v2(2188,2196)
U0_TX0: H2.1 U3.2 | length 215.1
  Top Layer w5: H2.1@1980,2177 2022.04,2176.96 2042.04,2196.96 v2(2152,2197)
  Bottom Layer w5: U3.2@2151.34,2231.76 v2(2152,2197)
U7_6: R16.2 U7.6 | length 146.8
  Bottom Layer w10: R16.2@1884.04,2938.36 1916.24,2906.06 1921.94,2906.06 1930.94,2897.06 1930.94,2870.06 1952.84,2848.16 U7.6@1977.64,2848.16
U7_7: R15.2 U7.7 | length 104.4
  Bottom Layer w10: R15.2@1936.04,2938.36 1947.94,2938.36 1947.94,2881.06 1961.14,2867.86 U7.7@1977.64,2867.86
USB_D+: U3.47 USB2.6 USB2.8 | length 1341.4
  Top Layer w5: v2(2157,2062) 2146.04,2072.96 2146.04,2090.76 2189.24,2133.96 2492.94,2133.96 2585.04,2226.06 2585.04,2600.96 2448.54,2737.46 v2(2421.94,2737.5)
  Bottom Layer w5: U3.47@2098.24,2052.66 2126.64,2052.66 2136.04,2061.96 v2(2157,2062) ; USB2.6@2380.04,2793.36 2380.04,2747.36 2389.94,2737.46 v2(2421.94,2737.5) 2419.44,2739.96 USB2.8@2419.44,2800.26
USB_D-: U3.46 USB2.5 USB2.7 | length 1350.7
  Top Layer w5: v2(2141,2042) 2141.04,2052.96 2135.04,2058.96 2135.04,2093.96 2185.94,2144.96 2483.94,2144.96 2570.94,2231.96 2570.94,2587.06 2441.04,2716.96 2411.04,2716.96 2390.54,2737.46 2383.94,2737.46 ; v2(2360.94,2737.5) 2391.54,2737.46 2400.94,2746.96 v2(2400.94,2754.5)
  Bottom Layer w5: U3.46@2098.23,2036.88 2123.84,2036.86 2129.04,2041.96 v2(2141,2042) ; USB2.5@2360.44,2800.16 2360.94,2799.66 v2(2360.94,2737.5) ; USB2.7@2399.74,2793.46 2400.94,2792.26 v2(2400.94,2754.5)
XTAL_N: C10.1 U3.21 X1.1 | length 221.6
  Bottom Layer w5: U3.21@2377.74,2099.86 2402.14,2099.86 2411.04,2090.96 2480.94,2090.96 X1.1@2499.12,2072.79 2570.74,2072.76 C10.1@2583,2060.55